# Altium PCB F4SDR.PcbDoc (part 2 of 2)
Units mil, origin at the board's own origin, x right, y up, seen from the top; angles counter-clockwise.
Board outline 1968.5 x 1968.5 mil, 4 copper layers (Top Layer, Internal Plane 1, Signal Layer 1, Bottom Layer), stack 64.634 mil thick; 238 components, 172 nets, 770 pads, 321 vias.
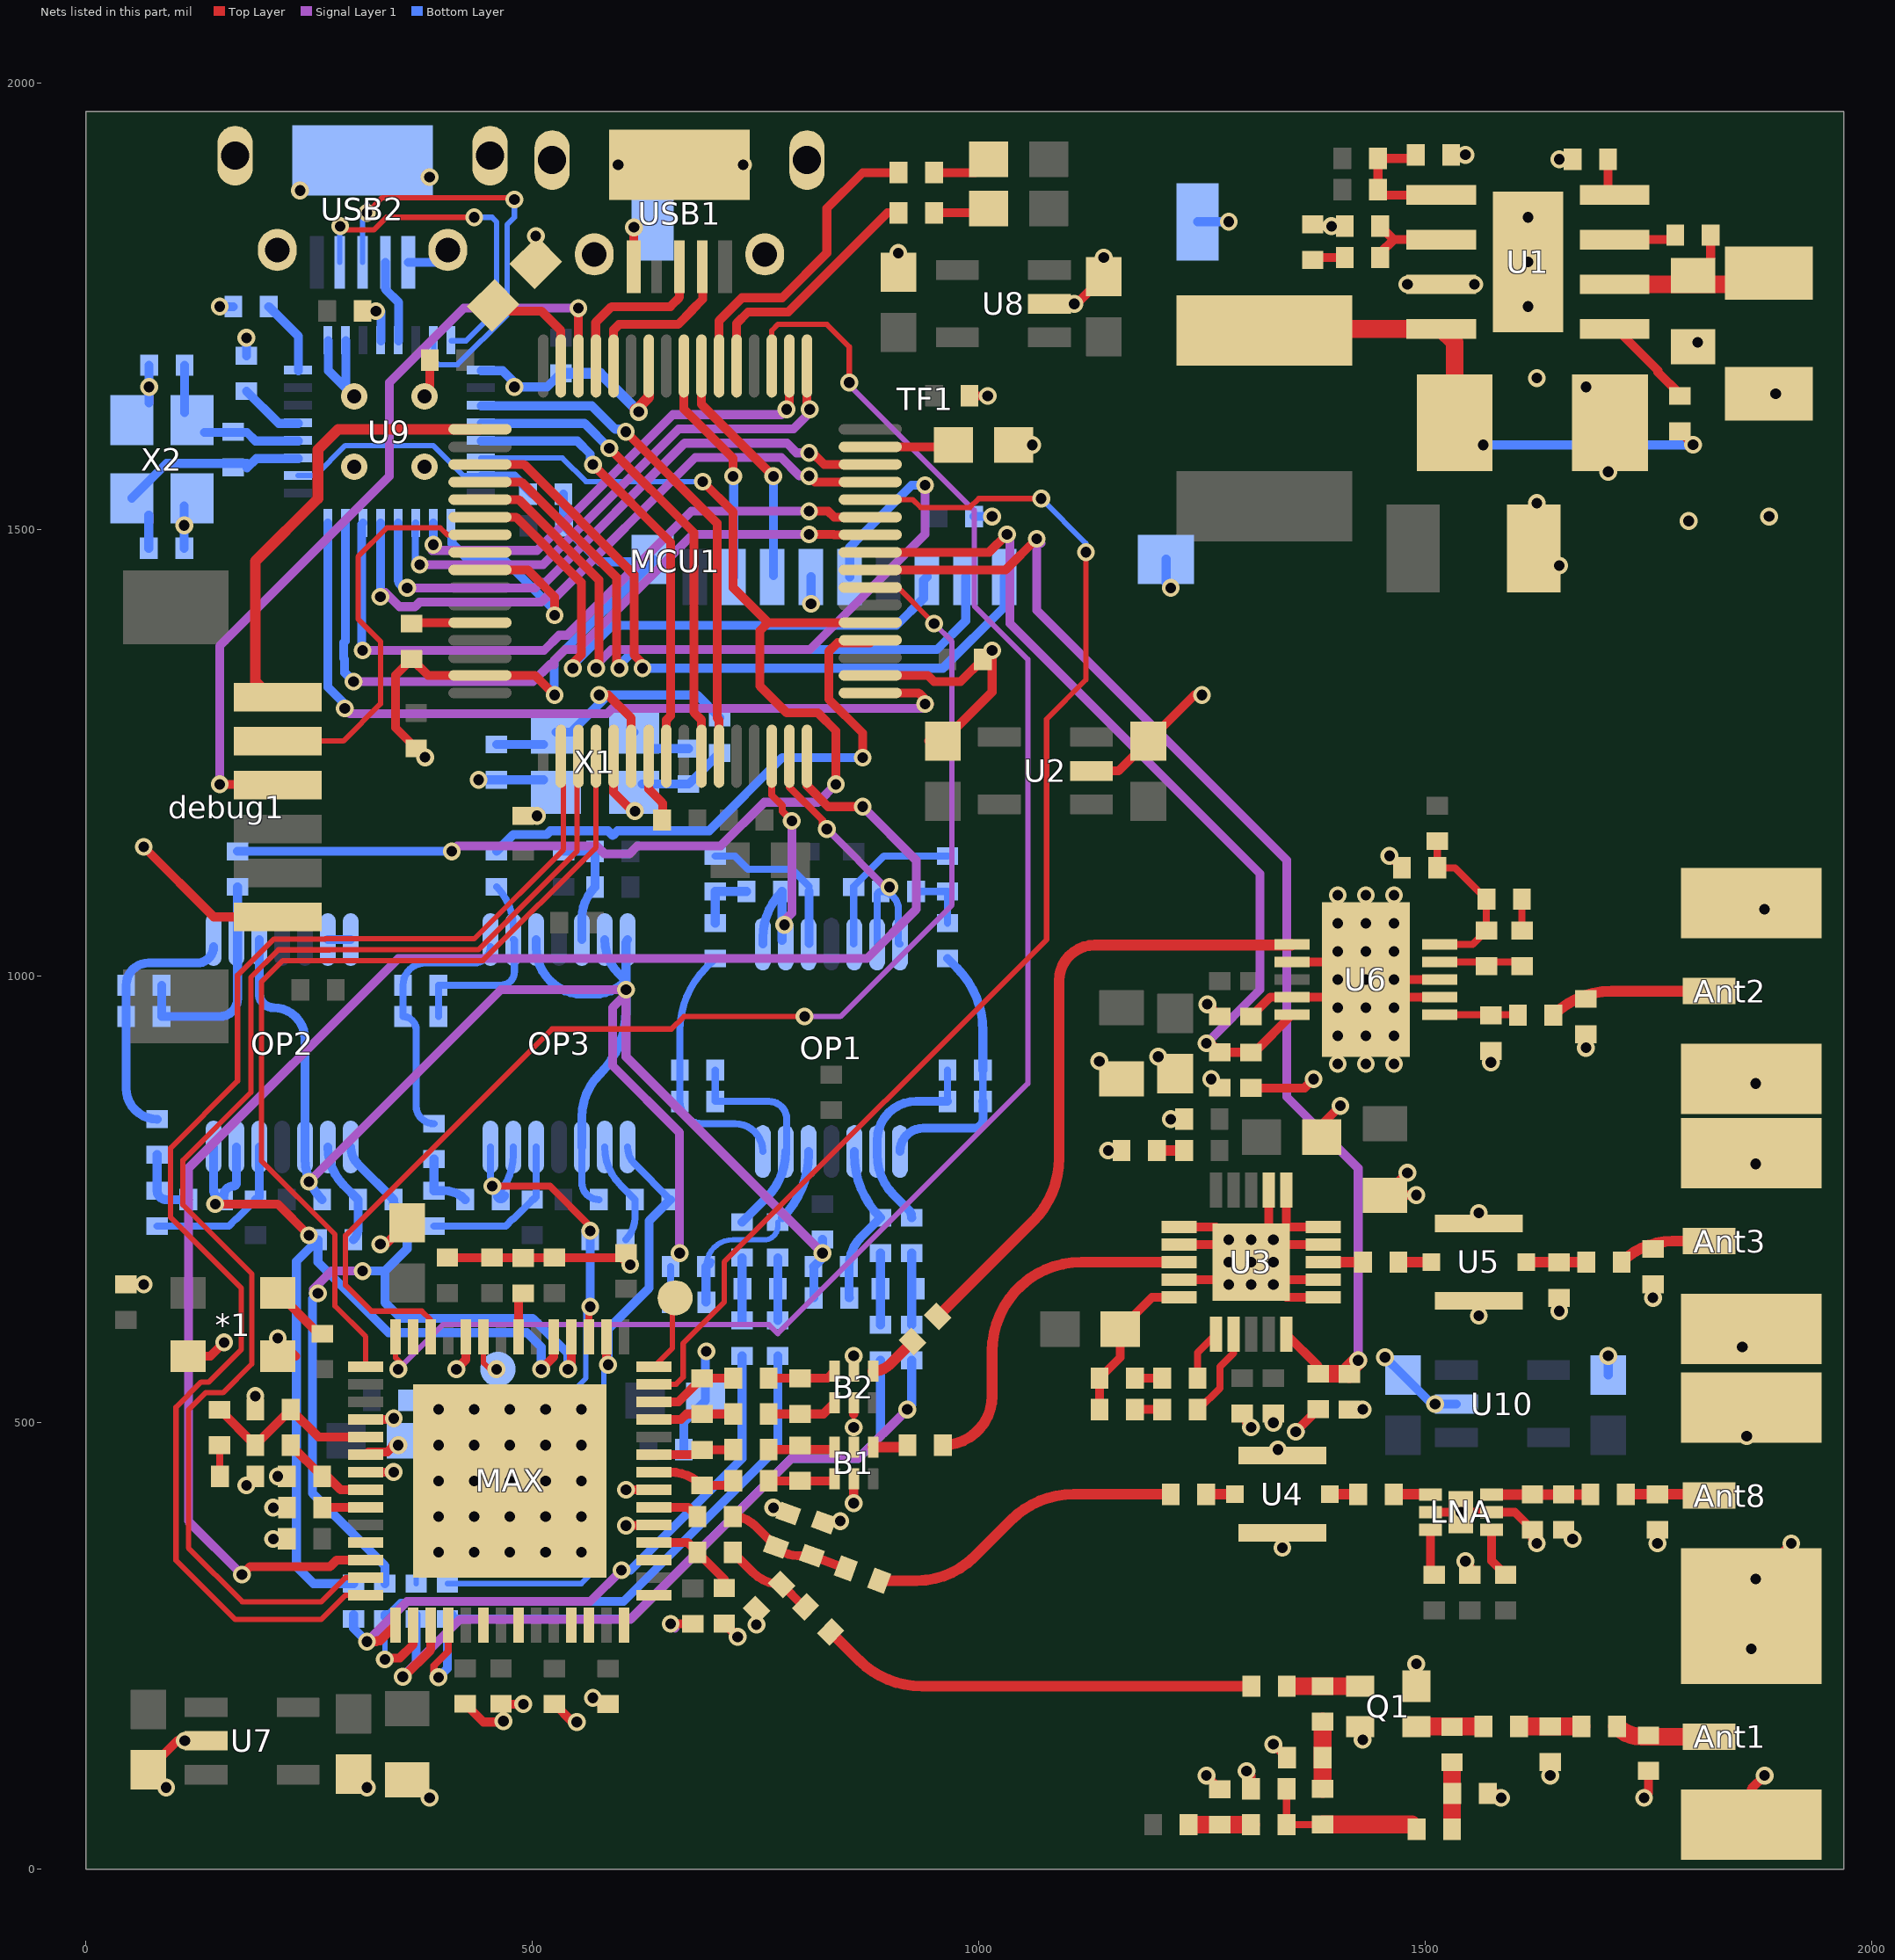
[diagram p4: the nets of this part, all layers, seen from the top]

## Via types
v1: diameter 20, hole 12, Top Layer to Bottom Layer, 291 vias
v2: diameter 19.68, hole 11.81, Top Layer to Bottom Layer, 21 vias
v3: diameter 20/20/20 (per signal layer), hole 12, Top Layer to Bottom Layer, 9 vias

## Nets (pads, with @x,y where several pads share a name; then routed paths per layer and width w, separated by ;. In a path a pad name is that pad's centre, name@x,y a point inside that pad or via, vN(x,y) a via of type N, cw(c..) or ccw(c..) an arc to the next point about the centre after c; other vN are vias at no path point) (continued)
GND: *1.1 *1.2 Ant1.GND Ant2.GND Ant3.GND Ant8.GND B1.2 B1.5 B2.2 B2.5 C1.1 C2.2 C3.2 C4.1 C5.1 C6.1 C7.1 C10.2 C11.2 C13.1 C14.2 C15.2 C16.1 C19.2 C20.2 C21.1 C22.1 C24.2 C25.1 C27.1 C29.2 C30.2 C31.2 C32.2 C33.2 C34.1 C35.1 C36.1 C37.1 C38.2 C40.2 C42.1 C44.2 C45.2 C48.2 C49.2 C50.1 C72.1 C73.1 C74.2 C75.2 C77.1 C78.1 C79.1 C81.2 C82.1 C83.2 C84.1 C85.2 C86.2 C87.2 C88.2 C93.2 C97.2 C98.2 C99.2 C100.2 C104.1 C105.1 C106.1 C107.1 C108.1 C109.2 C110.1 C111.2 C112.2 C114.1 C115.1 C116.1 C117.1 C118.2 C119.2 C120.2 C121.2 C122.2 C123.2 C124.1 D1.1 debug1.6 L5.1 LNA.0 LNA.2 LNA.5 MAX.0 MAX.5 MAX.7 MAX.24 MAX.32 MAX.34 MAX.35 MCU1.18 MCU1.63 Q1.2 Q1.4 R3.1 R9.1 R10.1 R15.1 R17.2 R19.2 R58.1 R59.1 R62.1 TF1.6 TF1.SHELL U1.0 U1.7 U2.2 U3.0 U3.1 U3.2 U3.4 U3.11 U3.12 U3.14 U3.15 U3.16 U3.17 U4.0 U5.0 U6.0 U6.2 U6.4 U6.7 U6.8 U7.2 U8.2 U9.0 U9.1 U9.2 U10.2 USB1.5 USB2.5 X1.2 X1.4 X2.2 X2.4 | length 5770.2
  Top Layer w10: C93.2@45,655 v1(65,655) ; v1(65,1145) 143.43,1066.57 debug1.6@215,1066.57 ; v1(90,91.54) C105.1@70,111.54 102.46,144 v1(111,144) U7.2@134.82,144 ; 134.8,574.57 139.57,574.57 v1(155,590) ; v1(180,430) C88.2@190,440 ; C85.2@190,510 v1(190,530) ; v1(210,370) C81.2@225,370 ; v1(210,405) C84.1@225.32,405 ; v1(215,440) C83.2@225,440 ; v1(215,594.76) 235.2,574.57 ; C104.1@300,106.54 v1(315,91.54) ; MAX.35@313.58,444.84 v1(344.84,444.84) ; MAX.34@313.58,464.53 316.36,467.31 337.82,467.31 344.27,473.75 344.27,475 v1(350,475) ; MAX.32@313.58,503.9 343.9,503.9 v1(345,505) ; v1(330,700) 336,700 C120.2@360,724 ; C124.1@360,100 365,100 v1(385,80) ; U9.0@379.37,1649.37 385.32,1655.31 C7.1@385.32,1690 ; v1(380,1245.31) C5.1@370,1255.31 347,1278.31 347,1337.31 R3.1@365,1355.31 383.27,1337.05 MCU1.63@441.5,1337.05 502.95,1337.05 v1(525,1315) ; C100.2@405,685 C99.2@455,685 C98.2@525,685 C97.2@600,685 ; v1(415,560) 425.79,570.79 MAX.24@425.79,596.42 ; C73.1@425,185.32 445.32,165 466.77,165 v1(467.77,166) ; C72.1@465,185.32 465.32,185 v1(490,185) ; R59.1@490,1179.69 v1(505.32,1179.69) ; C11.2@504.04,1799.04 v1(504.04,1829.04) ; C75.2@525,185 545,165 v1(550,165) ; v1(567.93,192.07) ccw(c585,209.14) C74.2@585,185 ; v1(596.14,1908.86) USB1.5@665,1908.86 v1(736.14,1908.86) ; v1(605,385) MAX.5@636.42,385.79 ; v1(605,425) MAX.7@636.42,425.16 ; C97.2@605,690 C97.2@600,685 ; v1(609.77,677) 608,677 C97.2@600,685 ; USB1.5@613.82,1794.69 v1(613.82,1838.82) ; v1(655,275) C86.2@680,275 ; C78.1@715,275.32 v1(730,260.32) ; v1(751.08,273.92) C77.1@751.08,291.08 ; v1(770,405) C82.1@786.73,398.5 ; L5.1@826.73,388.5 v1(845,390) ; v1(860,410) B1.5@860,437.28 ; B1.2@860,472.72 B1.2@860,476.61 ; 860,510 B2.5@860,522.28 ; B2.2@860,557.72 B2.2@860,561.61 ; MCU1.18@878.5,1337.05 942.95,1337.05 950,1330 979.68,1330 C4.1@1004.68,1355 ; C106.1@910,1788.46 v1(910,1810) ; C50.1@943.71,1263.46 C50.1@960,1263.46 1015,1318.46 v1(1015,1365) ; C6.1@989.68,1650 v1(1010,1650) ; C10.2@1039,1595 v1(1060,1595) ; U8.2@1079.18,1753 v1(1107,1753) 1109.54,1753 C107.1@1140,1783.46 v1(1140,1805) ; U2.2@1126.19,1230 1156.54,1230 C42.1@1190,1263.46 1241.54,1315 v1(1250,1315) ; v1(1135,905) 1155,885 C29.2@1160,885 ; v1(1145,805) R9.1@1160,805 ; v1(1201,910) C30.2@1220,891 ; v1(1215,840) C45.2@1230,840 ; U3.4@1224.29,660.32 U3.0@1285.31,660.32 ; U3.2@1224.29,699.68 U3.0@1285.31,699.68 ; U3.1@1224.29,719.37 U3.0@1265.63,719.37 ; v1(1255,105) 1255,104.68 C13.1@1270,89.68 ; v1@1255,970 v1@1256,969 ; v1(1256,968.69) v1@1256,969 ; v1(1260.31,885) R15.1@1270,875.32 ; C31.2@1270,955 v1@1256,969 ; v1(1300,110) 1305,105 C15.2@1305,90 ; C22.1@1300,515.32 1300,500 v1(1305,495) ; C33.2@1305,875 1365,875 v1(1375,885) ; C32.2@1305,955 1326.81,976.81 U6.4@1350.83,976.81 U6.0@1413.82,976.81 ; U3.0@1324.69,660.32 U3.12@1385.71,660.32 ; U3.17@1324.69,760.71 1324.69,699.68 U3.14@1385.71,699.68 ; v1(1330,140) 1330.31,140 C16.1@1345.31,125 ; v1(1330,500) C21.1@1330,510.32 C21.1@1330,515.32 ; v1(1335,470) 1335,468.31 U4.0@1340,463.31 ; v1(1340,360) U4.0@1340,376.69 ; U3.0@1344.37,640.63 U3.11@1385.71,640.63 ; U3.16@1344.37,760.71 1344.37,719.37 U3.15@1385.71,719.37 ; U6.2@1350.83,1016.18 U6.0@1413.82,1016.18 ; v1(1355,490) 1355,490.32 R10.1@1380,515.32 ; C24.2@1384,820 1384,834 v1(1405,855) ; v1(1395,1840) C40.2@1410,1840 ; C123.2@1415,515 v1(1430,515) ; Q1.4@1427.01,160 1427.01,147.99 v1(1430,145) ; v2(1433.5,996.5) v2(1465,996.5) U6.8@1516.18,996.5 ; U6.0@1453.19,976.81 U6.7@1516.18,976.81 ; v1(1460,1135) 1460.31,1135 C27.1@1473.82,1121.5 ; v1(1480,780) C25.1@1455,755 v1(1490,755) ; v1(1480,1775) U1.7@1518,1775 v1(1555,1775) ; Q1.2@1490,205.28 v1(1490,230) ; LNA.5@1505.75,400 v1(1540,400) LNA.2@1574.25,400 1600.31,400 C37.1@1620,380.32 1620,370 v1(1625,365) ; R17.2@1529,1920 v1(1545,1920) ; v1(1545,345) 1550,340 C34.1@1550,329.68 ; v1(1560,620) U5.0@1560,636.69 ; U5.0@1560,723.31 v1(1560,735) ; C14.2@1570,85 1580,85 v1(1585,80) ; v1(1573.5,903.61) C20.2@1573.5,916.5 ; C44.2@1621.52,1479 1633.82,1466.7 ccw(c1650,1482.89) v1(1650,1460) ; v1(1640,105) C117.1@1640,120.32 ; v1(1650,625) C122.2@1650,640 ; v1(1650,1915) R19.2@1665,1915 ; C36.1@1655,380.32 1655,380 v1(1665,370) ; v1(1680,920) C19.2@1680,935 ; v1(1705,1565) ccw(c1700.15,1569.85) 1707.01,1569.85 D1.1@1707.01,1620 ; v1(1745,80) 1750,85 C116.1@1750,110.32 ; v1(1755,640) C121.2@1755,655 ; v1(1760,365) C35.1@1760,380.32 ; C38.2@1800,1705 v1(1805,1710) ; v1(1855,585) 1857.93,587.93 ccw(c1840.86,605) Ant3.GND@1865,605 ; v1(1860,485) ccw(c1847.93,497.07) 1865,497.07 Ant8.GND@1865,516.85 ; Ant1.GND@1865,50 1865,90 v1(1880,105) ; v1(1865,246.85) Ant8.GND@1865,320 v1(1870,325) v1(1910,365) ; Ant3.GND@1865,801.85 ccw(c1881.54,801.85) 1869.84,790.16 v1(1870,790) ; Ant2.GND@1865,885 v1(1870,880) ; Ant2.GND@1865,1081.85 1866.09,1080.76 ccw(c1880,1094.67) v1(1880,1075) ; C48.2@1885,1652.48 v1(1892.52,1652.48)
  Signal Layer 1 w10: v1(467.77,166) v1@469,166 ; v1(655,275) v1@660,270 ; v1(1355,490) v1@1360,490 ; v1(1573.5,903.61) ccw(c1578.61,903.61) v1@1575,900
  Bottom Layer w10: X2.4@70.94,1641.99 v1(70.94,1660) C110.1@70.94,1684.37 ; C108.1@110.31,1479.37 v1(110.31,1505) X2.2@110.31,1526.59 ; v1(150,1750) R62.1@165.32,1750 ; C111.2@180,1695 v1(180,1715) ; U9.1@271.73,1711.73 271.73,1678.27 U9.0@291.42,1658.58 ; U9.2@291.42,1711.73 U9.0@291.42,1658.58 ; U9.0@301.26,1648.74 U9.0@291.42,1658.58 ; USB2.5@361.18,1799.69 391.69,1799.69 USB2.5@405.47,1813.46 ; v1(440,1220) C3.2@460,1220 X1.4@512.69,1220 ; v1(525,1315) 524.53,1315.47 524.53,1353.7 TF1.SHELL@635,1464.17 ; C112.2@535,1540 535,1505 C109.2@535.63,1504.37 575.83,1464.17 TF1.SHELL@635,1464.17 ; X1.2@610,1277.46 X1.2@614,1273.46 ; X1.2@632.46,1255 C2.2@675,1255 ; TF1.SHELL@635,1467.05 TF1.SHELL@635,1464.17 ; C79.1@669.68,470 669.68,500.68 C119.2@694,525 694,574 695,575 v1(695,580) ; v1(812.17,1417.17) TF1.6@812.17,1447.36 ; C1.1@994.68,1515 v1(1015,1515) ; TF1.SHELL@1209.8,1467.05 1209.8,1440.2 v1(1215,1435) ; TF1.SHELL@1245.24,1845 v1(1280,1845) ; v1(1455,573.46) C115.1@1475,553.46 1507.46,521 v1(1511,521) U10.2@1534.81,521 ; C114.1@1705,553.46 v1(1705,575)
  other v1: 395,355 435,355 475,355 515,355 555,355 395,395 435,395 475,395 515,395 555,395 395,435 435,435 475,435 515,435 555,435 395,475 435,475 475,475 515,475 555,475 860,495 395,515 435,515 475,515 515,515 555,515 860,575 1795,1510 1885,1515 1625,1530 1680,1660 1625,1670 1615,1750 1615,1800 1615,1850 240,1880 385,1895
  other v2: 1402.01,902.01 1433.5,902.01 1465,902.01 1402.01,933.5 1433.5,933.5 1465,933.5 1402.01,965 1433.5,965 1465,965 1402.01,996.5 1402.01,1027.99 1433.5,1027.99 1465,1027.99 1402.01,1059.49 1433.5,1059.49 1465,1059.49 1402.01,1090.98 1433.5,1090.98 1465,1090.98
  other v3: 1280,655 1305,655 1330,655 1280,680 1305,680 1330,680 1280,705 1305,705 1330,705
Net*1_3: *1.3 C113.1 | length 68.3
  Top Layer w10: *1.3@215.2,645.43 258.08,602.55 ccw(c265,609.47) C113.1@265,599.68
NetAnt1_1: Ant1.1 C116.2 L14.1 | length 106.2
  Top Layer w20: L14.1@1714.69,160 ccw(c1742.63,187.94) 1742.63,148.43 Ant1.1@1817.76,148.43
NetAnt2_1: Ant2.1 C19.1 L1.2 | length 181.5
  Top Layer w12: L1.2@1643.5,956.5 cw(c1708.52,891.48) 1708.52,983.43 Ant2.1@1817.76,983.43
NetAnt3_1: Ant3.1 C121.1 L15.2 | length 104
  Top Layer w12: L15.2@1720,680 cw(c1776.55,623.45) 1776.55,703.43 Ant3.1@1817.76,703.43
NetAnt8_1: Ant8.1 C35.2 L11.1 | length 93.7
  Top Layer w12: L11.1@1724.69,420 1755,420 1816.18,420 Ant8.1@1817.76,418.43
NetB1_1: B1.1 C90.1 | length 39.3
  Top Layer w12: B1.1@881.65,472.72 914.8,472.72 ccw(c914.8,480.51) C90.1@920.32,475
NetB1_3: B1.3 C91.1 C92.1 | length 74.4
  Top Layer w10: C92.1@764.68,470 831.79,470 ccw(c831.79,479.27) B1.3@838.35,472.72
NetB1_4: B1.4 C89.1 C91.2 | length 74.3
  Top Layer w10: C89.1@764.68,435 C91.2@800,435 832.83,435 ccw(c832.83,442.8) B1.4@838.35,437.28
NetB2_1: B2.1 C95.1 | length 57.1
  Top Layer w12: B2.1@881.65,557.72 ccw(c881.65,584.42) 900.54,565.54 C95.1@926.08,591.08
NetB2_3: B2.3 C101.1 L12.1 | length 76.9
  Top Layer w10: C101.1@764.68,550 830.63,550 B2.3@838.35,557.72
NetB2_4: B2.4 C94.1 L12.2 | length 78.7
  Top Layer w10: C94.1@764.68,510 L12.2@800,510 826.06,510 B2.4@838.35,522.28
NetC2_1: C2.1 MCU1.5 R8.2 X1.3 | length 174.1
  Top Layer w10: MCU1.5@591.1,1246.5 591.1,1206.1 612.2,1185 v1(615,1185)
  Bottom Layer w10: X1.3@623.32,1215.31 C2.1@675,1215.31 675.32,1215.31 R8.2@710,1250
NetC3_1: C3.1 MCU1.6 R8.1 X1.1 | length 363.1
  Top Layer w10: v1(575,1315) 585,1315 610.79,1289.21 MCU1.6@610.79,1246.5
  Bottom Layer w10: C3.1@460,1259.69 X1.1@512.91,1259.69 ; X1.1@526.69,1273.46 543.46,1273.46 580,1310 v1(575,1315) 684.68,1315 R8.1@710,1289.69
NetC8_1: C8.1 OP1.1 R1.1 R28.2 | length 306.3
  Bottom Layer w8: R1.1@1004.68,860 C8.1@1004.68,895
  Bottom Layer w10: OP1.1@911.77,803.86 cw(c937.91,803.86) 937.91,830 995,830 ccw(c995,840) 1005,840 1005,860 R1.1@1004.68,860 ; R28.2@965,1020 975.4,1009.6 cw(c904.68,938.89) 1004.68,938.89 C8.1@1004.68,895
NetC8_2: C8.2 OP1.2 R1.2 R25.1 | length 238.1
  Bottom Layer w8: R1.2@965,860 C8.2@965,895
  Bottom Layer w10: R25.1@925,729.68 ccw(c912.17,729.68) 921.24,738.76 905,755 cw(c950.43,800.43) 886.18,800.43 OP1.2@886.18,803.86 886.18,816.18 cw(c930,816.18) 930,860 R1.2@965,860
NetC9_1: C9.1 MCU1.15 OP1.13 OP1.14 | length 343.2
  Top Layer w8: MCU1.15@787.95,1246.5 787.95,1212.05 825,1175 825,1165 v1(830,1165)
  Signal Layer 1 w8: v1(830,1165) 900,1095 v1(900,1100) v1@900,1105
  Bottom Layer w8: OP1.13@886.18,1036.14 886.18,1090.87 cw(c890.32,1090.87) C9.1@890.32,1095 cw(c890.32,1075.31) 910,1075.31 910,1037.91 ccw(c911.77,1037.91) OP1.14@911.77,1036.14
NetC9_2: C9.2 R28.1 R29.2 | length 70.3
  Bottom Layer w8: C9.2@930,1095 R29.2@965,1095 R28.1@965,1059.69
NetC10_1: C10.1 MCU1.31 | length 91
  Top Layer w10: MCU1.31@878.5,1592.95 C10.1@969.49,1592.95
NetC11_1: C11.1 MCU1.47 | length 118
  Top Layer w10: C11.1@462.67,1745 510,1745 532.05,1722.95 MCU1.47@532.05,1683.5
NetC12_1: C12.1 U3.13 | length 44.6
  Top Layer w12: U3.13@1385.71,680 C12.1@1430.31,680
NetC12_2: C12.2 U5.1 | length 36.9
  Top Layer w12: C12.2@1470,680 U5.1@1506.85,680
NetC13_2: C13.2 FB2.2 R5.2 | length 70
  Top Layer w20: FB2.2@1235,50 C13.2@1270,50 R5.2@1305,50
NetC14_1: C14.1 L7.2 R6.2 | length 75
  Top Layer w20: R6.2@1530,45 L7.2@1530,120
NetC15_1: C15.1 R5.1 R6.1 R7.1 | length 208
  Top Layer w8: C15.1@1344.69,90 R5.1@1344.69,50 1404.69,50 1405,50.32
  Top Layer w20: R7.1@1385,50.32 1405,50.32 1485,50.32 R6.1@1490.31,45
NetC16_2: C16.2 L8.1 R7.2 | length 75.3
  Top Layer w20: R7.2@1385,90 C16.2@1385,125 L8.1@1385,165.32
NetC17_1: C17.1 L7.1 Q1.1 | length 75.3
  Top Layer w20: Q1.1@1490,160 C17.1@1565.31,160
NetC17_2: C17.2 C117.2 L14.2 | length 70
  Top Layer w20: C17.2@1605,160 C117.2@1640,160 L14.2@1675,160
NetC18_1: C18.1 C76.2 | length 492.1
  Top Layer w12: C76.2@834.14,265.86 865.71,234.29 ccw(c936.42,305) 936.42,205 C18.1@1305.31,205
NetC18_2: C18.2 L8.2 Q1.3 | length 82.1
  Top Layer w20: C18.2@1345,205 L8.2@1385,205 1426.73,205 Q1.3@1427.01,205.28
NetC20_1: C20.1 L1.1 U6.6 | length 87.9
  Top Layer w8: U6.6@1516.18,957.13 1603.19,957.13 L1.1@1603.82,956.5
NetC23_1: C23.1 R9.2 | length 30.3
  Top Layer w12: R9.2@1199.69,805 C23.1@1230,805
NetC26_2: C26.2 R11.1 | length 30.3
  Top Layer w10: C26.2@1175,550 R11.1@1205.31,550
NetC27_2: C27.2 C28.2 R12.2 R13.1 U6.10 | length 193.5
  Top Layer w8: R12.2@1513.5,1151.5 C27.2@1513.5,1121.5 1533.5,1121.5 C28.2@1568.5,1086.5 R13.1@1568.5,1051.18 1553.19,1035.87 U6.10@1516.18,1035.87
NetC28_1: C28.1 R14.1 | length 35.4
  Top Layer w8: C28.1@1608.19,1086.5 1608.19,1051.5 R14.1@1608.5,1051.18
NetC33_1: C33.1 MCU1.25 R15.2 U6.5 | length 992.2
  Top Layer w10: MCU1.25@878.5,1474.84 1011.61,1474.84 v1(1031.63,1494.86) ; v1(1255,925) 1255,930 R15.2@1270,915 C33.1@1304.69,915 ; C33.1@1305,914.68 C33.1@1304.69,915 ; U6.5@1350.83,957.13 1308.7,915 C33.1@1304.69,915
  Signal Layer 1 w10: v1@1035,1490 1035,1395 1315,1115 1315,985 v1(1255,925)
NetC36_2: C36.2 C37.2 L11.2 LNA.3 | length 110.9
  Top Layer w12: LNA.3@1574.25,419.68 1684.69,419.68 L11.2@1685,420
NetC39_1: C39.1 L10.2 | length 30.3
  Top Layer w10: L10.2@1175,515 C39.1@1205.31,515
NetC39_2: C39.2 U3.7 | length 101.7
  Top Layer w8: C39.2@1245,515 1246.14,515 1270,538.86 1270,562.94 1285.31,578.26 U3.7@1285.31,599.29
NetC40_1: C40.1 R20.1 U1.6 | length 95.7
  Top Layer w10: R20.1@1449.69,1810 1464.69,1825 ; C40.1@1449.69,1840 1464.69,1825 ; U1.6@1518,1825 1464.69,1825
NetC41_1: C41.1 D1.2 L2.1 U1.8 | length 564
  Top Layer w10: C41.1@1785,1610.31 v1(1800,1595.31)
  Top Layer w20: L2.1@1321.57,1725 U1.8@1518,1725 1532.99,1710.01 D1.2@1532.99,1620
  Bottom Layer w10: v1(1565,1595) 1799.69,1595 v1(1800,1595.31)
NetC41_2: C41.2 U1.1 | length 104.4
  Top Layer w10: U1.1@1712,1725 1714.06,1725 1760.51,1678.55 1760.51,1676.49 C41.2@1785,1652
NetC43_2: C43.2 R16.2 R17.1 U1.5 | length 144
  Top Layer w10: R16.2@1447,1881 C43.2@1447,1916 1485.31,1916 R17.1@1489.31,1920 ; R16.2@1453,1875 U1.5@1518,1875
NetC46_1: C46.1 LNA.4 | length 41.4
  Top Layer w12: C46.1@1464.69,420 1505.75,420 LNA.4@1505.75,419.68
NetC46_2: C46.2 U4.1 | length 31.9
  Top Layer w12: U4.1@1393.15,420 C46.2@1425,420
NetC47_1: C47.1 U4.2 | length 32.2
  Top Layer w12: C47.1@1254.69,420 U4.2@1286.85,420
NetC47_2: C47.2 L4.1 | length 358.3
  Top Layer w12: L4.1@888.5,323.27 930.46,323.27 ccw(c930.46,414.54) 995,350 1035.71,390.71 cw(c1106.42,320) 1106.42,420 C47.2@1215,420
NetC49_1: C49.1 R20.2 | length 33.3
  Top Layer w10: C49.1@1376.69,1805 R20.2@1410,1805
NetC51_1: C51.1 OP3.1 R26.1 R35.2 | length 297.4
  Bottom Layer w8: R35.2@390,835 cw(c390,855) 370,855 370,940.32 ccw(c355.32,940.32) C51.1@355.32,955 R26.1@355.32,990 cw(c380.32,990) 380.32,1015 435,1015 ccw(c435,1033.23) OP3.1@453.23,1033.23
NetC51_2: C51.2 OP3.2 R26.2 R33.1 | length 215.8
  Bottom Layer w8: C51.2@395,955 R26.2@395,990 465,990 ccw(c465,1005) 480,1005 480,1039.96 ccw(c478.82,1039.96) OP3.2@478.82,1041.14 ; R33.1@460,1100.31 cw(c414.57,1054.88) OP3.2@478.82,1054.88
NetC52_1: C52.1 MAX.17 OP3.13 OP3.14 R23.2 R34.2 | length 869.3
  Top Layer w8: v1(455.3,765.1) 519.9,765.1 565,720 v1(565,715) ; MAX.17@563.58,596.42 563.58,628.58 v1(565,630)
  Bottom Layer w6: R23.2@370,320 370,356.87 387.13,374 524,374 535,385 535,525 560,550 560,625 v1(565,630)
  Bottom Layer w8: OP3.14@453.23,808.86 453.23,777.66 ccw(c492.34,777.66) v1(455.3,765.1) ; C52.1@470,755.32 cw(c464.68,755.32) C52.1@464.68,750 ; OP3.13@478.82,808.86 478.82,800.12 cw(c414.57,800.12) C52.1@462.77,757.63 ; v1(455.3,765.1) ccw(c492.34,777.66) C52.1@460.4,755.09 ; v1(455.3,765.1) C52.1@462.77,757.63 ; C52.1@460.4,755.09 ccw(c414.57,800.12) C52.1@462.77,757.63 ; C52.1@460.4,755.09 cw(c414.57,800.12) 460,754.68 ccw(c464.68,754.68) C52.1@464.68,750 ; C52.1@460.4,755.09 ccw(c492.34,777.66) C52.1@464.68,750 ; C52.1@462.77,757.63 464.68,755.72 C52.1@464.68,750
  Bottom Layer w10: v1(565,630) R34.2@565,705
NetC52_2: C52.2 R35.1 R36.2 | length 73
  Bottom Layer w10: R35.1@390,795.32 R36.2@390,760 400.86,760 cw(c400.86,725.86) C52.2@425,750
NetC53_1: C53.1 R24.1 R25.2 | length 80.3
  Bottom Layer w10: R24.1@925,609.68 R25.2@925,690
NetC53_2: C53.2 R31.1 R32.2 | length 80.3
  Bottom Layer w10: R31.1@890,609.68 C53.2@890,650 R32.2@890,690
NetC54_2: C54.2 OP1.12 R29.1 | length 183.7
  Bottom Layer w8: OP1.12@860,1036.14 C54.2@860,1100 860,1100.83 893.86,1134.69 R29.1@965,1134.69
NetC55_2: C55.2 OP3.12 R36.1 | length 190.4
  Bottom Layer w8: R36.1@390,720.32 470.32,720.32 478,728 478.83,728 C55.2@500.93,750.1 ; C55.2@500,750 ccw(c500,754.41) C55.2@500.93,750.1 ; OP3.12@504.41,808.86 C55.2@504.41,754.41 ; C55.2@500.93,750.1 ccw(c500,754.41) C55.2@504.31,753.48 ; C55.2@500.93,750.1 C55.2@504.31,753.48 ; C55.2@504.31,753.48 ccw(c500,754.41) C55.2@504.41,754.41 ; C55.2@504.31,753.48 504.41,753.58 C55.2@504.41,754.41
NetC56_1: C56.1 OP1.3 R32.1 R37.2 | length 184.5
  Bottom Layer w10: R37.2@855,640 854.68,640.32 C56.1@854.68,675 cw(c901.45,675) 868.38,708.07 R32.1@890,729.68 889.88,729.81 cw(c960.59,800.52) 860.59,800.52 OP1.3@860.59,803.86
NetC57_1: C57.1 OP1.7 R38.1 R44.2 | length 297.1
  Bottom Layer w8: R44.2@705,1020 694.6,1009.6 ccw(c765.32,938.89) 665.32,938.89 C57.1@665.32,895 R38.1@665.32,860 ccw(c690.32,860) 690.32,835 727.09,835 cw(c727.09,803.86) OP1.7@758.23,803.86
NetC57_2: C57.2 OP1.6 R38.2 R41.1 | length 259.5
  Bottom Layer w8: C57.2@705,895 R38.2@705,860 765,860 cw(c765,840) 785,840 785,805.04 cw(c783.82,805.04) OP1.6@783.82,803.86
  Bottom Layer w10: R41.1@735,724.68 762.36,752.04 ccw(c710.54,803.86) OP1.6@783.82,803.86
NetC58_1: C58.1 MCU1.14 OP1.8 OP1.9 | length 322.9
  Top Layer w8: MCU1.14@768.27,1246.5 768.27,1202.87 780,1191.14 780,1185 v1@787.95,1177.05
  Top Layer w10: v1@787.95,1177.05 790,1175 790,1174.7 v1(790.7,1174)
  Signal Layer 1 w10: v1(782.35,1057.65) 780,1060 790.7,1070.7 v1(790.7,1174)
  Bottom Layer w10: OP1.8@758.23,1036.14 758.23,1043.2 cw(c831.49,1043.2) C58.1@779.68,1095 OP1.9@779.68,1040.28
NetC58_2: C58.2 R44.1 R45.2 | length 70.3
  Bottom Layer w10: R44.1@705,1059.69 R45.2@705,1095 C58.2@740,1095
NetC59_1: C59.1 OP2.1 R42.1 R51.2 | length 292.4
  Bottom Layer w10: R51.2@80,840 cw(c80,874.68) 45.32,874.68 C59.1@45.32,955 R42.1@45.32,990 cw(c70.32,990) 70.32,1015 125,1015 ccw(c125,1033.23) OP2.1@143.23,1033.23
NetC59_2: C59.2 OP2.2 R42.2 R49.1 | length 256.7
  Bottom Layer w10: R42.2@85,990 C59.2@85,955 150,955 ccw(c150,975) 170,975 R49.1@170,1100.31
NetC60_1: C60.1 MAX.19 OP2.13 OP2.14 R39.2 R50.2 | length 1088.4
  Top Layer w10: v1(145,745) 215,745 v1(250,710) ; v1(510,560) 524.21,574.21 MAX.19@524.21,596.42
  Bottom Layer w10: OP2.14@143.23,808.86 143.23,761.46 ccw(c154.68,761.46) C60.1@154.68,750 149.68,745 v1(145,745) ; C60.1@154.68,754.68 cw(c165,754.68) 165,765 ccw(c165,768.82) 168.82,768.82 OP2.13@168.82,808.86 ; R39.2@300,320 255,320 236,339 236,681 R50.2@260,705 260,680 339,601 494,601 510,585 v1(510,560)
NetC60_2: C60.2 R51.1 R52.2 | length 81
  Bottom Layer w10: R51.1@80,800.32 R52.2@80,760 ccw(c90,760) 90,750 C60.2@115,750
NetC61_1: C61.1 R40.1 R41.2 | length 70.3
  Bottom Layer w10: R40.1@735,614.68 R41.2@735,685
NetC61_2: C61.2 R47.1 R48.2 | length 70.3
  Bottom Layer w10: R47.1@775,614.68 C61.2@775,650 R48.2@775,685
NetC62_2: C62.2 OP1.10 R45.1 | length 178.1
  Bottom Layer w8: R45.1@705,1134.69 727.03,1134.69 741.72,1120 790.83,1120 810,1100.83 C62.2@810,1100
  Bottom Layer w10: OP1.10@810,1036.73 C62.2@810,1095
NetC63_2: C63.2 OP2.12 R52.1 | length 184.2
  Bottom Layer w8: R52.1@80,720.32 160.32,720.32 168,728 168.83,728 190,749.17 C63.2@190,750
  Bottom Layer w10: C63.2@190,750 ccw(c190,754.41) 194.41,754.41 OP2.12@194.41,808.86
NetC64_1: C64.1 OP1.5 R48.1 R53.2 | length 240.6
  Bottom Layer w6: C64.1@694.68,675 cw(c724.68,675) 724.68,705 760,705 ccw(c760,720) 775,720 R48.1@775,724.68
  Bottom Layer w8: C64.1@694.68,675 ccw(c694.68,680.32) C64.1@700,680.32
  Bottom Layer w10: R53.2@694.68,635.32 C64.1@694.68,675 ; R48.1@780.12,729.81 ccw(c709.41,800.52) 809.41,800.52 OP1.5@809.41,803.86
NetC71_1: C71.1 OP3.5 R54.2 R55.1 | length 138.1
  Bottom Layer w10: R54.2@535,1140 R55.1@570.32,1140 C71.1@570.32,1100 ccw(c605.86,1064.45) 555.59,1064.45 OP3.5@555.59,1041.14
NetC76_1: C76.1 C77.2 L3.1 | length 107.8
  Top Layer w10: L3.1@724.68,355 747.39,332.29 ccw(c779.14,364.04) C77.2@779.14,319.14 ; C77.2@782.07,317.93 ccw(c779.14,315) C77.2@779.14,319.14 ; C76.1@806.08,293.92 cw(c806.08,298.06) 803.15,295.13 C77.2@779.14,319.14
NetC78_2: C78.2 L3.2 MAX.4 | length 95.6
  Top Layer w10: MAX.4@636.42,366.1 673.9,366.1 L3.2@685,355 715,325
NetC80_1: C80.1 C82.2 L4.2 L5.2 | length 144.3
  Top Layer w10: C80.1@724.68,395 cw(c724.68,359.56) 749.75,384.62 C82.2@773.16,361.21 ccw(c797.3,385.35) 797.3,351.21 L5.2@813.16,351.21 L4.2@851.21,336.84
NetC80_2: C80.2 MAX.6 | length 52.9
  Top Layer w10: MAX.6@636.42,405.47 674.53,405.47 C80.2@685,395
NetC83_1: C83.1 MAX.36 R56.1 | length 104.5
  Top Layer w10: R56.1@229.68,475 C83.1@264.68,440 270.4,440 285.24,425.16 MAX.36@313.58,425.16
NetC84_2: C84.2 MAX.37 | length 48.1
  Top Layer w10: C84.2@265.47,405.47 MAX.37@313.58,405.47
NetC85_1: C85.1 MAX.33 R56.2 R57.1 | length 209.3
  Top Layer w10: R57.1@150,514.68 189.68,475 C85.1@229.68,515 260.47,484.21 MAX.33@313.58,484.21
NetC88_1: C88.1 R57.2 | length 35.1
  Top Layer w8: R57.2@150,475 150,440.32 C88.1@150.32,440
NetC89_2: C89.2 L6.2 MAX.8 | length 93.9
  Top Layer w10: MAX.8@636.42,444.84 654.17,444.84 cw(c654.17,394.17) L6.2@690,430 712.93,430 ccw(c712.93,447.07) C89.2@725,435
NetC90_2: C90.2 U3.3 | length 402.8
  Top Layer w12: C90.2@960,475 ccw(c960,530) 1015,530 1015,580 cw(c1115,580) 1115,680 U3.3@1224.29,680
NetC92_2: C92.2 L6.1 MAX.9 | length 89.6
  Top Layer w10: MAX.9@636.42,464.53 677.55,464.53 ccw(c677.55,482.14) L6.1@690,469.68 C92.2@724.68,469.68
NetC94_2: C94.2 C96.2 MAX.11 | length 91.1
  Top Layer w10: MAX.11@636.42,503.9 666.84,503.9 672.94,510 C96.2@690,510 C94.2@725,510
NetC95_2: C95.2 U6.1 | length 712
  Top Layer w12: C95.2@954.14,619.14 1060.71,725.71 ccw(c990,796.42) 1090,796.42 1090,995 cw(c1130,995) 1130,1035 1349.96,1035 ccw(c1349.96,1035.87) U6.1@1350.83,1035.87
NetC96_1: C96.1 C101.2 MAX.12 | length 99.5
  Top Layer w10: MAX.12@636.42,523.58 663.9,523.58 C96.1@690,549.68 690.32,550 C101.2@725,550
NetC108_2: C108.2 R61.2 U9.27 X2.3 | length 249.2
  Bottom Layer w10: X2.3@51.63,1535.37 51.63,1535.46 90.54,1574.37 180.63,1574.37 180.63,1569.37 191.1,1579.84 U9.27@238.27,1579.84 ; C108.2@70.63,1479.37 X2.3@70.63,1516.37
NetC110_2: C110.2 R61.1 U9.28 X2.1 | length 162.7
  Bottom Layer w10: X2.1@110.63,1631.14 C110.2@110.63,1684.37 ; X2.1@132.72,1609.06 180.63,1609.06 190.16,1599.53 U9.28@238.27,1599.53
NetC111_1: C111.1 U9.29 | length 73.2
  Bottom Layer w10: C111.1@180,1655.31 216.1,1619.21 U9.29@238.27,1619.21
NetC112_1: C112.1 U9.15 U9.26 | length 298.2
  Bottom Layer w6: U9.26@237.64,1560.79 257.18,1560.79 290.79,1594.39 389.21,1594.39 422.82,1560.79 U9.15@442.36,1560.79
  Bottom Layer w10: U9.15@442.99,1560.16 480.16,1560.16 C112.1@500.32,1540
NetC122_1: C122.1 L15.1 U5.2 | length 67.2
  Top Layer w12: U5.2@1613.15,680 L15.1@1680.31,680
NetC123_1: C123.1 MCU1.24 R10.2 U3.10 | length 1390.3
  Top Layer w10: MCU1.24@878.5,1455.16 1030.16,1455.16 v1(1065,1490) ; U3.10@1344.37,599.29 1380,563.66 R10.2@1380,555
  Top Layer w20: R10.2@1380,555 C123.1@1414.69,555 ; C123.1@1415,554.68 1415,560 v1(1425,570)
  Signal Layer 1 w10: v1@1070,1485 v1(1065,1490) 1065,1410 1345,1130 1345,865 1425,785 v1(1425,570)
Netdebug1_1: debug1.1 MCU1.49 | length 534.7
  Top Layer w12: debug1.1@237.64,1312.64 debug1.1@215,1312.64 207.36,1312.64 190,1330 190,1465 260,1535 260,1590 282.64,1612.64 MCU1.49@441.5,1612.64
Netdebug1_2: debug1.2 MCU1.55 | length 460.7
  Top Layer w6: debug1.2@215,1263.43 288.43,1263.43 330,1305 330,1375 305,1400 305,1470 337.31,1502.31 397.08,1502.31 404.87,1494.53 MCU1.55@441.5,1494.53
Netdebug1_3: debug1.3 MCU1.46 | length 905
  Top Layer w10: v1(150,1215) 214.21,1215 debug1.3@215,1214.21 ; MCU1.46@551.73,1683.5 v1(551.73,1748.27)
  Signal Layer 1 w10: v1(150,1215) 150,1370 340,1560 340,1665 423.27,1748.27 v1(551.73,1748.27)
NetL9_1: L9.1 LNA.6 | length 52.4
  Top Layer w10: LNA.6@1505.75,380.32 1505.75,333.94 L9.1@1510,329.68
NetLED1_2: LED1.2 R21.2 | length 56
  Top Layer w10: R21.2@950,1855 LED1.2@1006,1855
NetLED2_2: LED2.2 R22.2 | length 46
  Top Layer w10: R22.2@950,1900 LED2.2@996,1900
NetLNA_1: LNA.1 R2.1 | length 57.2
  Top Layer w10: LNA.1@1574.25,380.32 1574.25,345.43 R2.1@1590,329.68
NetMAX_1: MAX.1
NetMAX_3: MAX.3
NetMAX_13: MAX.13 MCU1.28 | length 1426.6
  Top Layer w6: MAX.13@636.42,543.27 661.22,543.27 669,551.05 669,589 715,635 715,680 1076,1041 1076,1288 1120,1332 v1(1120,1475) ; MCU1.28@878.5,1533.9 926.1,1533.9 935,1525 990,1525 1000,1535 v1(1070,1535)
  Bottom Layer w6: v1(1070,1535) 1120,1485 v1(1120,1475)
NetMAX_14: MAX.14 T2.1 | length 88.6
  Top Layer w6: MAX.14@636.42,562.95 657,583.54 657,640 T2.1@660,640
NetMAX_16: MAX.16 OP3.8 R27.1 R30.2 | length 731
  Top Layer w10: MAX.16@583.27,596.42 583.27,566.73 v1(585,565)
  Bottom Layer w6: R30.2@405,320 555,320 580,345 580,560 v1(585,565)
  Bottom Layer w8: OP3.8@606.77,808.86 ccw(c633.2,808.86) 614.51,790.17 R27.1@654.68,750
  Bottom Layer w10: v1(585,565) 585,605 630.77,650.77 630.77,713.99 630.98,714.21 630.98,726.3 R27.1@654.68,750
NetMAX_18: MAX.18 OP2.8 R43.1 R46.2 | length 953
  Top Layer w10: v1(540,560) 543.9,563.9 MAX.18@543.9,596.42
  Signal Layer 1 w10: v1(260,645) 255,645 255,650 275,670 v1(310,670)
  Bottom Layer w10: v1(260,645) 254,639 254,421 335,340 R46.2@335,320 ; OP2.8@296.77,808.86 ccw(c323.2,808.86) 304.51,790.17 R43.1@344.68,750 344.68,745.32 360,730 360,695 335,670 ; v1(310,670) 335,670 ; v1(540,560) 540,577.63 500.63,617 353,617 335,635 335,670
NetMAX_21: MAX.21 R58.2 | length 48.6
  Top Layer w10: MAX.21@484.84,596.42 R58.2@484.84,645
NetMAX_23: MAX.23 T1.1 | length 47
  Top Layer w6: MAX.23@445.47,596.42 445.47,566.8 452.27,560 v1(460,560)
NetMAX_26: MAX.26 MCU1.23 | length 1454
  Top Layer w6: MAX.26@386.42,596.42 386.42,615.05 376.37,625.1 319.9,625.1 291,654 291,709.73 522.27,941 655.8,941 669.8,955 v1(805,955) ; MCU1.23@878.5,1435.47 909.53,1435.47 v1(950,1395) ; v1(950,1395) 955,1390 955,1400 v1(950,1395)
  Signal Layer 1 w6: v1(805,955) 845,955 970,1080 970,1375 v1(950,1395)
NetMAX_27: MAX.27
NetMAX_28: MAX.28 MCU1.35 | length 1928
  Top Layer w6: MAX.28@347.05,596.42 347.05,572.95 355,565 v1(350,560) ; MCU1.35@768.27,1683.5 768.27,1723.27 775,1730 830,1730 855,1705 v1(855,1665)
  Signal Layer 1 w6: v1@355,565 400,610 765,610 775,600 1055,880 1055,1355 995,1415 995,1521.87 855,1661.87 v1(855,1665)
NetMAX_29: MAX.29 MCU1.4 | length 1018.1
  Top Layer w6: MAX.29@313.58,562.95 313.58,596.42 279,631 279,711 197,793 197,993.97 220.66,1017.63 444.6,1017.63 571.42,1144.45 MCU1.4@571.42,1246.5
NetMAX_39: MAX.39
NetMAX_40: MAX.40 MCU1.16 | length 1805.3
  Top Layer w10: v1(175,330) 184,339 273.7,339 281.12,346.42 MAX.40@313.58,346.42 ; MCU1.16@807.64,1246.5 807.64,1213.58 831.21,1190 v1(870,1190)
  Signal Layer 1 w10: v1(175,330) 115,390 115,785 350,1020 875,1020 930,1075 930,1130 v1(870,1190)
NetMAX_41: MAX.41 MCU1.3 | length 1508.6
  Top Layer w6: MAX.41@313.58,326.73 290.9,326.73 263.85,299.69 175.31,299.69 115,360 115,514.41 134.27,533.68 153.68,533.68 186,566 186,666.84 108.92,743.92 108.92,793.92 185,870 185,998.94 215.69,1029.63 272.91,1029.63 273.28,1030 440,1030 550,1140 550,1244.76 MCU1.3@551.73,1246.5
NetMAX_42: MAX.42 MCU1.2 | length 1534.3
  Top Layer w6: MAX.42@313.58,307.05 290.9,307.05 263.85,280 167.16,280 101.08,346.08 101.08,517.46 129.3,545.68 137.85,545.68 174,581.84 174,651 95,730 95,807.84 170,882.84 170,1001.21 210.42,1041.63 267.94,1041.63 268.31,1042 435.03,1042 535,1141.97 535,1243.54 MCU1.2@532.05,1246.5
NetMAX_43: MAX.43 R39.1 R40.2 | length 696.2
  Top Layer w10: v1(315,255) 325.3,255 326.3,256 329.46,256 MAX.43@347.05,273.58
  Signal Layer 1 w10: v1(315,255) 360,300 565,300 v1(600,335)
  Bottom Layer w10: R39.1@300,285.32 300,270 v1(315,255) ; v1(600,335) 610,335 735,460 R40.2@735,575
NetMAX_44: MAX.44 R46.1 R47.2 | length 729.4
  Top Layer w10: v1(335,235) 336.68,236.68 351.68,236.68 366.73,251.73 MAX.44@366.73,273.58
  Bottom Layer w6: v1(335,235) R46.1@335,280.32 ; R46.1@335,282.76 352.24,300 435,300
  Bottom Layer w10: R46.1@335,282.76 R46.1@335,285.32 ; 435,300 602.37,300 775,472.63 R47.2@775,575
NetMAX_45: MAX.45 R23.1 R24.2 | length 895.7
  Top Layer w10: v1(355,215.68) 355.68,215 386.42,245.73 MAX.45@386.42,273.58
  Signal Layer 1 w10: v1@355,217.17 v1(355,215.68) 419.32,280 610,280 790,460 865,460 v1(920,515)
  Bottom Layer w10: v1(355,215.68) 370,230.68 R23.1@370,280.32 R23.1@370,285.32 ; v1(920,515) 925,520 R24.2@925,570
NetMAX_46: MAX.46 R30.1 R31.2 | length 810.1
  Top Layer w8: v1(395,215) 390,220 390,228.1 406.1,244.2 MAX.46@406.1,273.58
  Bottom Layer w10: v1(395,215) 405,225 R30.1@405,280.32 R30.1@410,280.32 ; R30.1@410.32,285.32 405,285.32 R30.1@410,280.32 ; R30.1@414.32,276 R30.1@410,280.32 ; R31.2@890,570 890,485 865,460 790,460 610.32,280.32 R30.1@410,280.32
NetMAX_48: MAX.48
NetMAX_50: MAX.50
NetMAX_53: MAX.53
NetMAX_54: MAX.54
NetMAX_56: MAX.56
NetMCU1_7: MCU1.7 R4.1 | length 78.2
  Top Layer w10: MCU1.7@630.47,1246.5 630.47,1209.53 645.32,1194.69 645.32,1194.38 646,1193.7 646,1176.3 645.32,1175.62 R4.1@645.32,1175
NetMCU1_8: MCU1.8 U9.13 | length 505.8
  Top Layer w10: v1(568.03,1573.03) 655,1486.07 655,1291.77 650.16,1286.93 MCU1.8@650.16,1246.5
  Bottom Layer w10: U9.13@442.99,1599.53 550.47,1599.53 565,1585 565,1576.07 v1(568.03,1573.03)
NetMCU1_10: MCU1.10 U9.12 | length 542.6
  Top Layer w10: v1(586.42,1591.42) 681,1496.84 681,1295.46 689.53,1286.93 MCU1.10@689.53,1246.5
  Bottom Layer w10: U9.12@442.99,1619.21 558.63,1619.21 v1(586.42,1591.42)
NetMCU1_11: MCU1.11 U9.11 | length 580.4
  Top Layer w10: v1(604.8,1609.8) 707,1507.61 707,1289.14 709.21,1286.93 MCU1.11@709.21,1246.5
  Bottom Layer w10: U9.11@442.99,1638.9 566.78,1638.9 592.84,1612.84 601.77,1612.84 v1(604.8,1609.8)
NetMCU1_17: MCU1.17 U9.24 | length 952.1
  Top Layer w10: MCU1.17@878.5,1317.36 932.64,1317.36 945,1305 v1(940,1305)
  Signal Layer 1 w10: v1(290,1300) 296,1294 583.7,1294 589.7,1300 940,1300 v1(940,1305)
  Bottom Layer w10: U9.24@271.1,1507.64 271.1,1323.9 290,1305 v1(290,1300)
NetMCU1_20: MCU1.20 R33.2 | length 645.6
  Top Layer w10: v1(870,1245) 870,1272.43 832.07,1310.36 832.07,1363.73 841.97,1373.64 878.5,1373.64 MCU1.20@878.5,1376.42
  Bottom Layer w10: R33.2@460,1140 478.68,1158.69 516.13,1158.69 520.44,1163 574,1163 584.87,1163 590.16,1157.71 595.44,1163 616,1163 698,1163 780,1245 v1(870,1245)
NetMCU1_21: MCU1.21 R49.2 U9.14 | length 1511.3
  Top Layer w10: v1(690.97,1554.03) 725,1520 725,1435 763.9,1396.1 ; v1(840,1215) 840,1275 820,1295 785,1295 755,1325 755,1387.2 763.9,1396.1 ; MCU1.21@878.5,1396.1 763.9,1396.1
  Signal Layer 1 w10: v1(410,1140) 416,1146 464.2,1146 572.33,1146 581.33,1137 608.67,1137 617.67,1146 655.8,1146 711,1146 760,1195 820,1195 v1(840,1215)
  Bottom Layer w6: U9.14@442.36,1580.47 533.73,1580.47 560.16,1554.03 v1(690.97,1554.03)
  Bottom Layer w10: R49.2@170,1140 v1(410,1140)
NetMCU1_26: MCU1.26 U9.23 | length 832.6
  Top Layer w10: v1(810,1494.9) 837.7,1494.9 838.07,1494.53 MCU1.26@878.5,1494.53
  Signal Layer 1 w10: v1(300,1330) 500.83,1330 519.83,1349 524.53,1349 524.53,1353.7 536.83,1366 551,1366 679.9,1494.9 v1(810,1494.9)
  Bottom Layer w10: U9.23@290.79,1507.64 290.79,1375.49 289,1373.7 289,1356 290,1355 290,1340 v1(300,1330)
NetMCU1_27: MCU1.27 U9.22 | length 778.1
  Top Layer w10: v1(810,1520.9) 831.39,1520.9 838.07,1514.21 MCU1.27@878.5,1514.21
  Signal Layer 1 w10: v1(310,1365) 513.2,1365 530.2,1382 539.16,1382 678.06,1520.9 v1(810,1520.9)
  Bottom Layer w10: v1@309,1366 309,1506.17 U9.22@310.47,1507.64
NetMCU1_29: MCU1.29 U9.21 | length 720.2
  Top Layer w10: v1(810,1560.27) 816.69,1553.58 MCU1.29@878.5,1553.58
  Signal Layer 1 w10: v1(330,1425) 335,1430 335.31,1430 339,1426.31 351.3,1414 368.7,1414 373.7,1419 509.99,1419 516.3,1425.31 526.8,1425.31 682.48,1581 778.7,1581 799.43,1560.27 v1(810,1560.27)
  Bottom Layer w10: v1@330.16,1425.16 U9.21@330.16,1507.64
NetMCU1_30: MCU1.30 U9.20 | length 673.9
  Top Layer w10: v1(810,1586.27) 813.7,1586.27 826.7,1573.27 MCU1.30@878.5,1573.27
  Signal Layer 1 w10: v1(360,1435) 503.36,1435 509.67,1441.31 514.96,1441.31 670.64,1597 785.33,1597 796.06,1586.27 v1(810,1586.27)
  Bottom Layer w10: U9.20@349.84,1507.64 349.84,1445.16 ccw(c360,1445.16) v1(360,1435)
NetMCU1_33: MCU1.33 U9.19 | length 602.8
  Top Layer w10: MCU1.33@807.64,1683.5 807.64,1638.16 v1(810.8,1635)
  Signal Layer 1 w10: v1(374,1461) 512.02,1461 664.02,1613 792.49,1613 810.8,1631.3 v1(810.8,1635)
  Bottom Layer w8: v1@369.21,1465.79 369.21,1507.32 U9.19@369.53,1507.64
NetMCU1_34: MCU1.34 U9.18 | length 548
  Top Layer w10: v1(784.8,1635) 787.95,1638.16 MCU1.34@787.95,1683.5
  Signal Layer 1 w10: v1(389.21,1483.31) 389.21,1478.42 387.9,1477.1 388,1477 505.39,1477 657.39,1629 778.8,1629 v1(784.8,1635)
  Bottom Layer w10: v1@385.9,1480 v1(389.21,1483.31) U9.18@389.21,1507.64
NetMCU1_37: MCU1.37 R21.1 | length 280.4
  Top Layer w10: MCU1.37@728.9,1683.5 728.9,1731.27 741.63,1744 786.63,1744 897.63,1855 R21.1@910.32,1855
NetMCU1_38: MCU1.38 R22.1 | length 349.8
  Top Layer w10: MCU1.38@709.21,1683.5 709.21,1734.21 735,1760 780,1760 830,1810 830,1860 870,1900 R22.1@910.32,1900
NetMCU1_42: MCU1.42 R64.1 U9.9 | length 271.4
  Top Layer w12: v1@615,1635 v1@616.38,1635 ; v1(619.31,1632.07) v1@616.38,1635 ; MCU1.42@630.47,1683.5 630.47,1648.34 617.13,1635 v1@616.38,1635
  Bottom Layer w10: U9.9@442.99,1678.27 466.73,1678.27 480,1665 v1(480,1660) 516.73,1660 R64.1@532.05,1675.31
  Bottom Layer w12: R64.1@532.05,1675.31 576.06,1675.31 v1(619.31,1632.07)
NetMCU1_56: MCU1.56
NetMCU1_57: MCU1.57 U9.17 | length 277.2
  Top Layer w10: MCU1.57@441.5,1455.16 494.84,1455.16 525,1425 v1(525,1404.31)
  Bottom Layer w10: U9.17@408.9,1493.33 410.21,1492.01 410.21,1484.79 430,1465 470,1465 525,1410 v1(525,1404.31)
NetMCU1_60: MCU1.60 R3.2 | length 75.4
  Top Layer w10: R3.2@366.1,1396.1 MCU1.60@441.5,1396.1
NetOP2_6: OP2.6 OP2.7 | length 25.6
  Bottom Layer w10: OP2.6@271.18,1041.14 OP2.7@296.77,1041.14
NetOP2_9: OP2.9 R43.2 R50.1 | length 116.7
  Bottom Layer w10: OP2.9@271.18,808.86 ccw(c331.63,808.86) 288.89,766.11 R43.2@305,750 305,717.83 cw(c286.85,717.83) R50.1@299.68,705
NetOP3_9: OP3.9 R27.2 R34.1 | length 118
  Bottom Layer w8: OP3.9@581.18,808.86 ccw(c641.63,808.86) 598.89,766.11 R27.2@615,750 615,729.9 cw(c579.78,729.9) R34.1@604.68,705
NetR11_2: R11.2 U3.6 | length 57.8
  Top Layer w8: R11.2@1245,550 1245,578.66 U3.6@1265.63,599.29
NetR13_2: R13.2 R14.2 U6.9 | length 87.6
  Top Layer w8: U6.9@1516.18,1016.18 R14.2@1603.82,1016.18
NetR18_2: R18.2 U1.3 | length 63
  Top Layer w10: U1.3@1712,1825 R18.2@1775,1825
NetR19_1: R19.1 U1.4 | length 32.7
  Top Layer w10: U1.4@1704.69,1882.31 R19.1@1704.69,1915
NetR60_2: R60.2 U9.4 | length 38.6
  Bottom Layer w10: v1(325,1745) 330,1745 330.79,1744.21 U9.4@330.79,1711.73
NetR62_2: R62.2 U9.32 | length 85.5
  Bottom Layer w10: R62.2@205,1750 238.27,1716.73 U9.32@238.27,1678.27
NetU9_5: U9.5 USB2.4 | length 94.1
  Bottom Layer w10: USB2.4@335.59,1799.69 335.59,1769.41 350.47,1754.53 U9.5@350.47,1711.73
NetU9_7: U9.7 USB2.3 | length 491.8
  Top Layer w6: v1(315,1855) 332,1872 v1@478,1872
  Signal Layer 1 w6: v1(315,1855) 315,1865
  Bottom Layer w6: USB2.3@310,1799.69 v1@310,1850 ; U9.7@389.84,1711.73 389.84,1690.16 395,1685 416.19,1685 472,1740.81 472,1842 480,1850 v1(480,1870)
NetU9_8: U9.8 USB2.2 | length 388
  Top Layer w6: v1(285,1840) 289,1836 322.87,1836 336.87,1850 v1(435,1850)
  Bottom Layer w6: USB2.2@284.41,1799.69 v1@284.41,1839.41 ; U9.8@409.53,1711.73 425.95,1711.73 460,1745.78 460,1845 455,1850 v1(435,1850)
PC8: MCU1.39 TF1.7 | length 268.3
  Top Layer w10: MCU1.39@689.53,1683.5 689.53,1640.47 v1(770,1560)
  Bottom Layer w10: TF1.7@770,1448.5 v1(770,1560)
PC9: MCU1.40 TF1.8 | length 259.2
  Top Layer w10: MCU1.40@669.84,1683.5 669.84,1635.16 725,1580 v1(725,1560)
  Bottom Layer w10: v1(725,1560) 725.55,1559.45 TF1.8@725.55,1447.36
PC10: MCU1.51 TF1.1 | length 799.8
  Top Layer w10: MCU1.51@441.5,1573.27 490.76,1573.27 614.06,1449.97 614.06,1360 623.53,1350.53 v1(623.53,1345)
  Bottom Layer w10: v1(623.53,1345) 960,1345 1028.7,1413.7 TF1.1@1028.7,1447.36
PC11: MCU1.52 TF1.2 | length 761.6
  Top Layer w10: MCU1.52@441.5,1553.58 487.81,1553.58 594.37,1447.03 594.37,1348.16 v1(597.53,1345)
  Bottom Layer w10: v1(597.53,1345) 597.53,1348.7 614.83,1366 953.16,1366 985.39,1398.23 TF1.2@985.39,1447.36
PC12: MCU1.53 TF1.5 | length 908.7
  Top Layer w10: MCU1.53@441.5,1533.9 484.87,1533.9 574.69,1444.08 574.69,1348.16 v1(571.53,1345)
  Signal Layer 1 w10: v1(571.53,1345) 571.53,1348.7 588.83,1366 811,1366 940,1495 v1(940,1550)
  Bottom Layer w10: v1(571.53,1345) v1@571.53,1348.7 ; TF1.5@855.47,1447.36 855.47,1480.47 870,1495 925,1550 v1(940,1550)
PD2: MCU1.54 TF1.3 | length 696.8
  Top Layer w10: MCU1.54@441.5,1514.21 481.93,1514.21 555,1441.14 555,1360 545.53,1350.53 v1(545.53,1345)
  Bottom Layer w10: v1(545.53,1345) 545.53,1348.7 589.83,1393 908,1393 938.24,1423.24 938.24,1443.52 TF1.3@942.09,1447.36
USB_N: MCU1.44 USB1.2 | length 195.6
  Top Layer w10: MCU1.44@591.1,1683.5 591.1,1723.94 597.17,1730 663.28,1730 678.89,1745.61 678.89,1746.11 691,1758.22 USB1.2@691,1799
USB_P: MCU1.45 USB1.3 | length 193.1
  Top Layer w10: MCU1.45@571.1,1683.5 571.1,1732.22 588.88,1750 655,1750 655,1750.5 665,1760.5 USB1.3@665,1799
VREF: C56.2 C64.2 C68.1 C69.1 C70.1 OP2.3 OP2.10 OP3.3 OP3.6 OP3.7 OP3.10 R37.1 R53.1 | length 2105.1
  Signal Layer 1 w10: v1(250,770) 465,985 v1(605,985) v1@605,980 ; v1(665,690) 665,825 590,900 590,965 v1@605,980 ; v1(825,690) 605,910 v1@605,980
  Bottom Layer w8: OP3.10@555.59,808.86 555.59,769.09 ccw(c574.68,769.09) C70.1@574.68,750 ; R53.1@655,635.32 C64.2@655,675
  Bottom Layer w10: OP2.3@194.41,1041.14 194.41,980.59 ccw(c210,980.59) 210,965 cw(c210,929.41) 245.59,929.41 OP2.10@245.59,808.86 245.59,796.1 ccw(c310.78,796.1) C68.1@264.68,750 ; OP3.3@504.41,1041.14 504.41,1032.64 ccw(c557.64,1032.64) 520,995 ccw(c556.21,1031.21) 556.21,980 568.79,980 ccw(c568.79,1031.21) v1@605,995 ; OP3.10@555.59,808.86 555.59,842.14 cw(c624.28,842.14) 575.71,890.71 ccw(c505,961.42) 605,961.42 v1(605,985) 605,995 ; OP3.6@581.18,1041.14 ccw(c635.07,1041.14) 596.97,1003.03 605,995 ; OP3.7@606.77,1041.14 ccw(c611.05,1036.86) 605,1036.86 605,995 ; C56.2@815,675 C56.2@815.32,674.68 ; R37.1@815.32,640 C56.2@815.32,674.68 ; C69.1@825,705.32 v1(825,690) 825,684.37 C56.2@815.32,674.68
VREF2: C26.1 L10.1 R63.1 U3.5 | length 180.2
  Top Layer w10: L10.1@1135.31,515 C26.1@1135.31,550 1158.46,573.15 R63.1@1158.46,605 1194.09,640.63 U3.5@1224.29,640.63
VSYS: C38.1 C48.1 R18.1 U1.2 | length 185.8
  Top Layer w10: C38.1@1819.69,1804.69 R18.1@1819.69,1830
  Top Layer w20: U1.2@1712,1775 C48.1@1872.48,1775
pads on no net: B1.6 B2.6 debug1.5 debug1.shell MAX.51 MCU1.9 MCU1.22 MCU1.36 MCU1.41 MCU1.43 MCU1.50 MCU1.58 MCU1.59 MCU1.61 MCU1.62 TF1.9 U2.4 U7.4 U8.4 U9.3 U9.10 U10.4 USB1.4

## Polygon pours and split planes (outlines as drawn)
GND on Bottom Layer "Top Layer-No Net" (solid, remove dead copper, pour order 4): 0,1968.5 1955,1968.5 1968.5,0 0,10 0,1968.5
GND on Signal Layer 1 "Top Layer-No Net" (solid, remove dead copper, pour order 9): 0,1968.5 1968.5,1968.5 1968.5,0 0,0
GND on Top Layer "Top Layer-No Net" (solid, remove dead copper, pour order 11): 0,5 1968.5,0 1968.5,1968.5 0,1968.5
AGND on Internal Plane 1 (split plane): 1232.45,1293.94 1232.45,1156.06 1198.94,1122.55 1035,1122.55 1034.02,1122.35 1033.2,1121.8 1032.64,1120.98 1032.45,1120 1032.45,781.06 973.94,722.55 20.1,722.55 20.1,1061.49 116.06,1157.45 630,1157.45 630.98,1157.65 631.8,1158.2 671.8,1198.2 806.06,1332.45 1193.94,1332.45
GND on Internal Plane 1 (split plane): 1948.41,20.1 20.1,20.1 20.1,717.45 975,717.45 975.98,717.64 976.8,718.2 1036.8,778.2 1037.36,779.02 1037.55,780 1037.55,1117.45 1200,1117.45 1200.98,1117.65 1201.8,1118.2 1236.8,1153.2 1237.35,1154.02 1237.55,1155 1237.55,1295 1237.35,1295.98 1236.8,1296.8 1196.8,1336.8 1195.98,1337.35 1195,1337.55 805,1337.55 804.02,1337.35 803.2,1336.8 668.2,1201.8 628.94,1162.55 115,1162.55 114.02,1162.35 113.2,1161.8 20.1,1068.7 20.1,1948.41 1948.41,1948.41

## Keep-outs
Keep-Out Layer:
  the board outline again, w39.37

## Other copper
Top Layer:
  pour cut-out: 0,720 975,720 1035,780 1035,1120 1200,1120 1235,1155 1235,1295 1195,1335 805,1335 630,1160 115,1160 0,1045
Signal Layer 1:
  pour cut-out: 0,725 975,725 1035,785 1035,1125 1200,1125 1235,1160 1235,1300 1195,1340 805,1340 630,1165 115,1165 0,1050
Bottom Layer:
  pour cut-out: 0,725 975,725 1035,785 1035,1125 1200,1125 1235,1160 1235,1300 1195,1340 805,1340 630,1165 115,1165 0,1050
Internal Plane 1 (plane layer: these items are gaps in the copper):
  lines w5: 0,720 975,720 1035,780 1035,1120 1200,1120 1235,1155 1235,1295 1195,1335 805,1335 670,1200 630,1160 115,1160 0,1045 0,720

## Text inside footprints (layer, text, board x,y; h text height)
U1: Top Overlay "*" at 1695,1700 h50 r180